# Altium PCB pH-meter.PcbDoc
Units mm, origin at the board's own origin, x right, y up, seen from the top; angles counter-clockwise.
Board outline 55 x 105 mm, 2 copper layers (Top Layer, Bottom Layer); 49 components, 47 nets, 210 pads, 31 vias.
Unrouted connection lines stored in the file: 2.
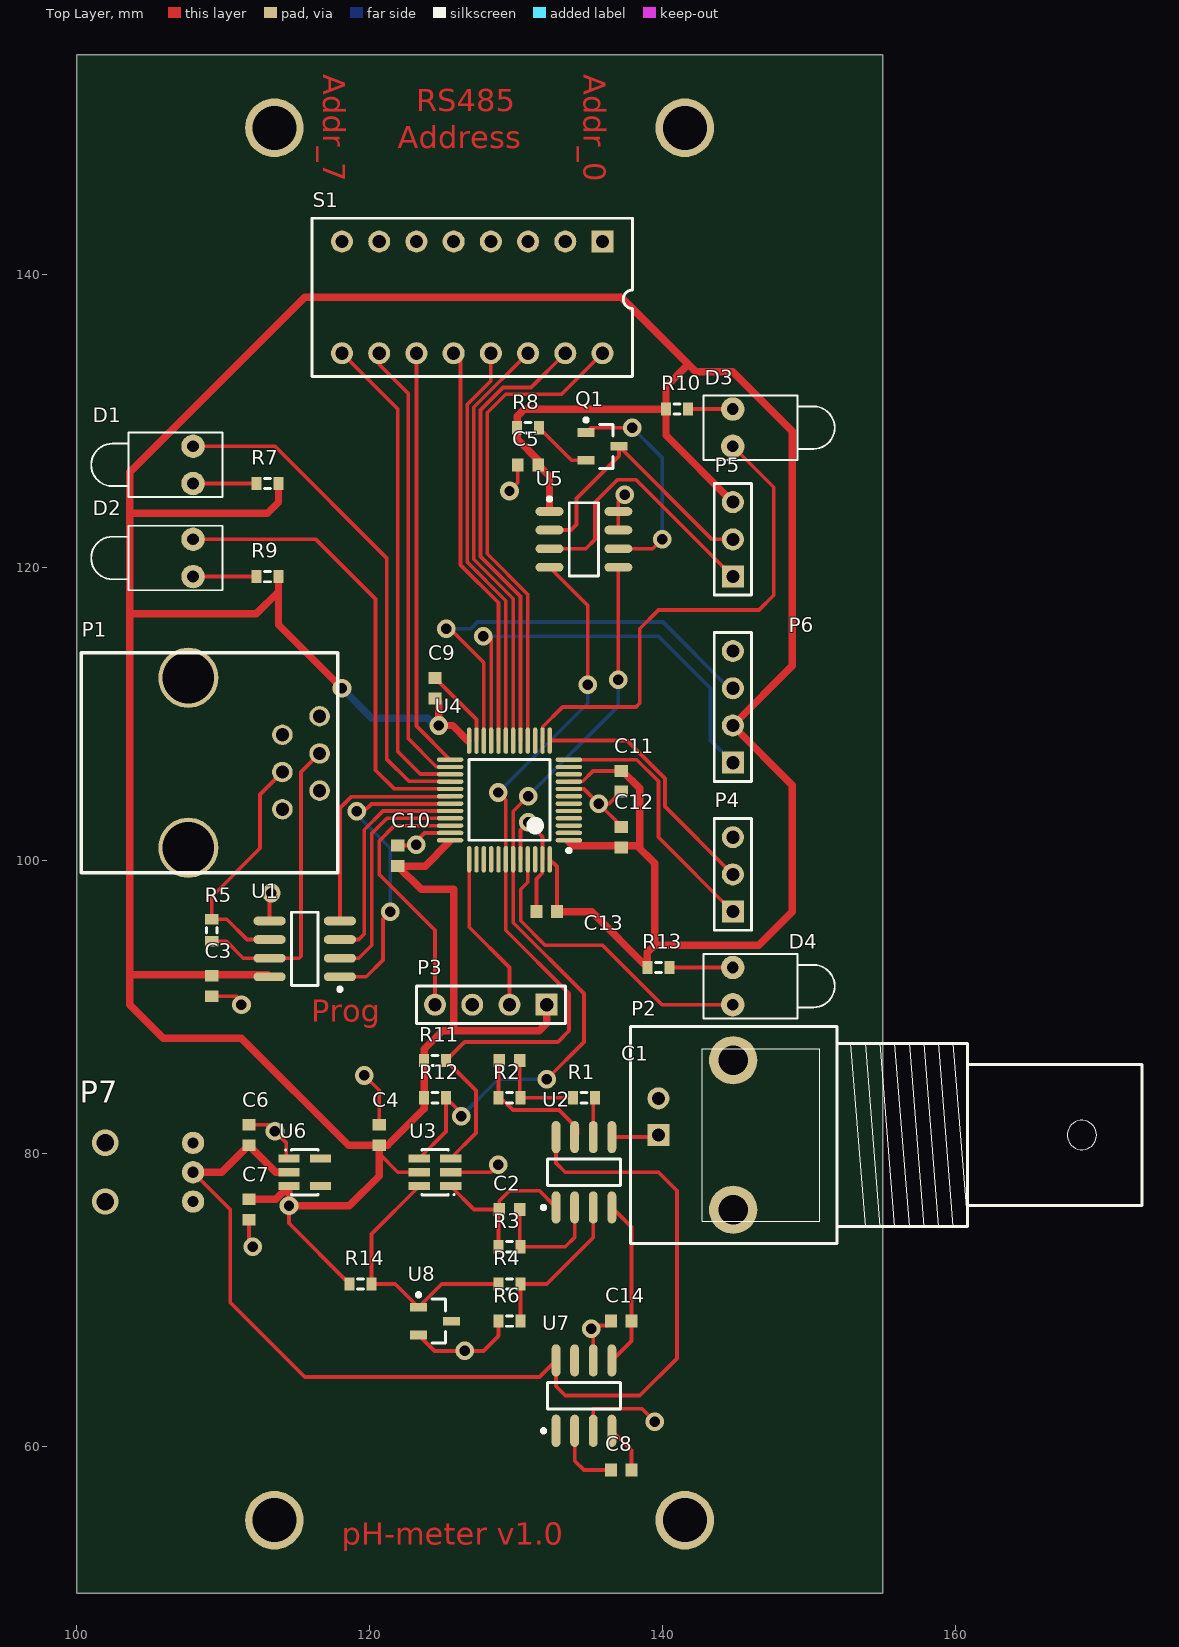
[diagram p0: Top Layer view]
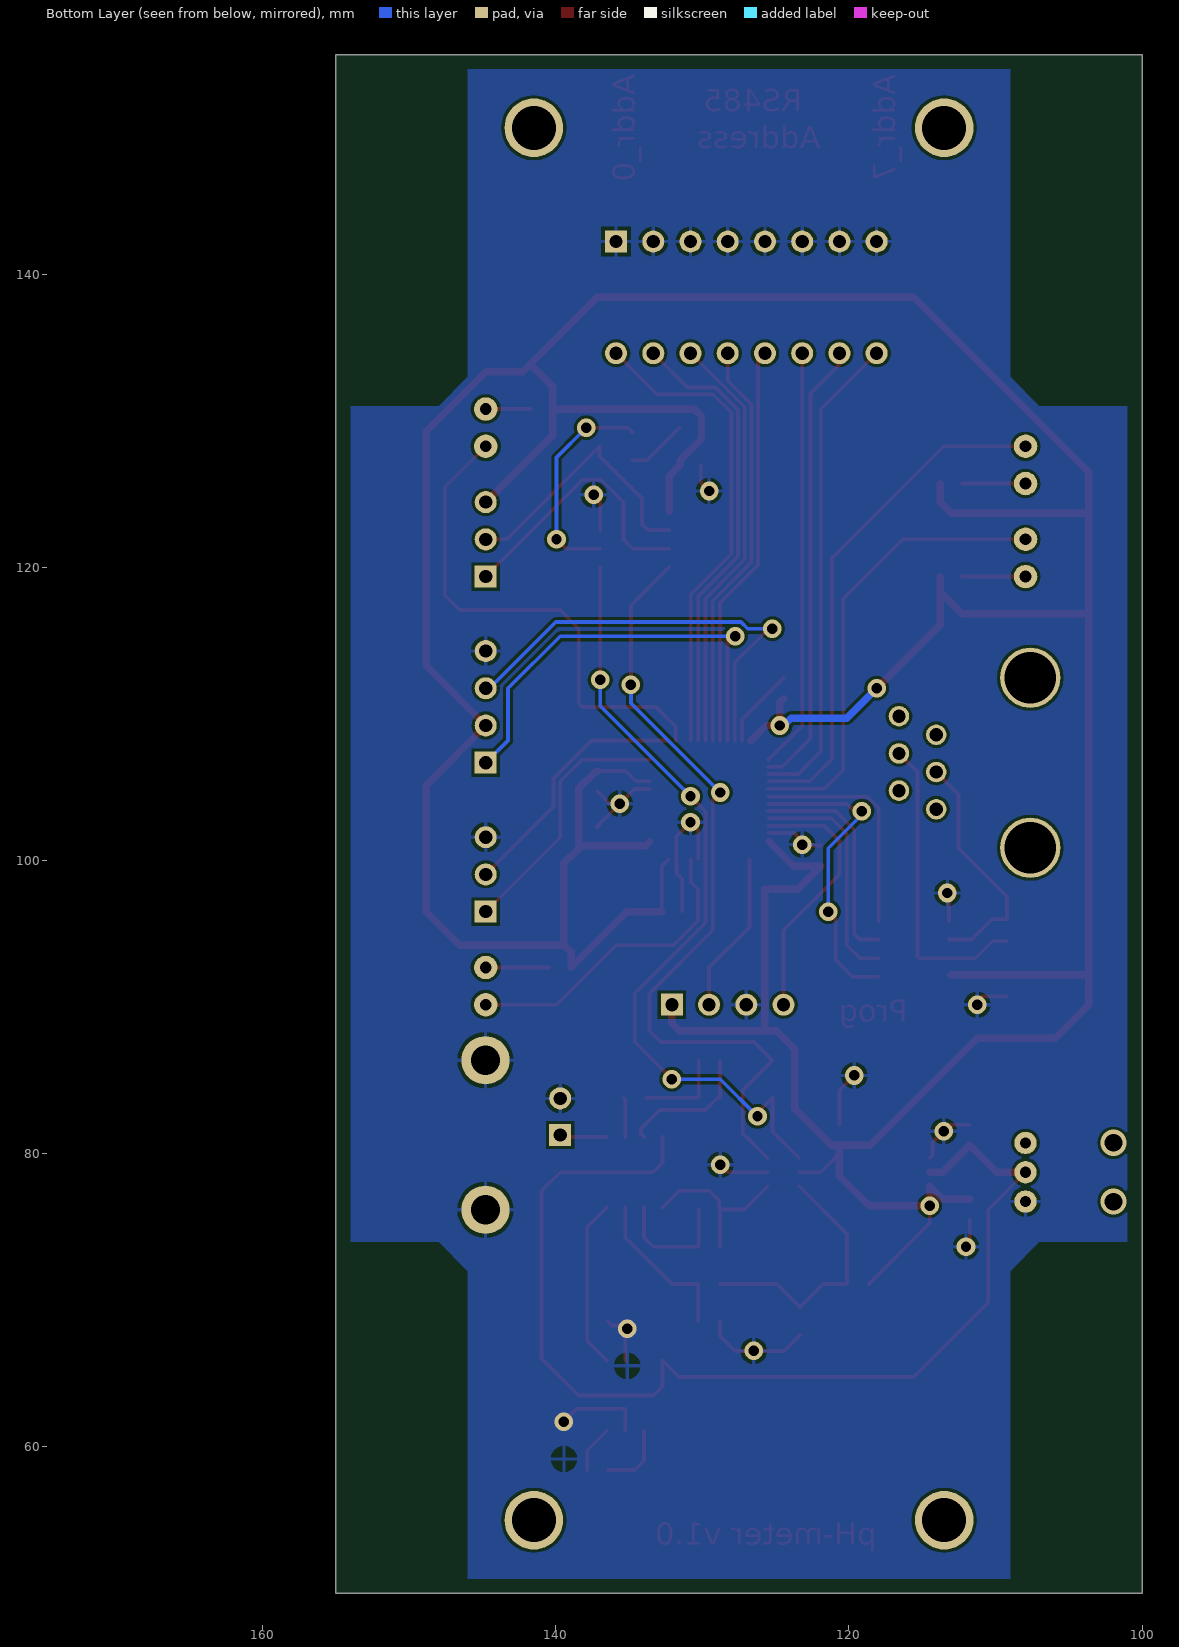
[diagram p1: Bottom Layer view, seen from below]

## Layer stack, top to bottom
Top Layer: signal copper 0.0356
Dielectric: dielectric 0.32, FR-4, Dk 4.8
Bottom Layer: signal copper 0.0356

## Board outline
100,50 100,155 155,155 155,50

## Design rules (kind name [scope] priority, off if disabled: settings)
Clearance [All] p1: gap=0.2
PolygonConnect [All] p1: connectstyle=Relief reliefconductorwidth=0.254 reliefentries=4 polygonreliefangle="90 Angle" airgapwidth=0.254
RoomDefinition pH-meter [InComponentClass('pH-meter')] p1: confinementstyle=ConfineIn formatcopy=TRUE lockcomponents=FALSE outline 100,50 155,50 155,155 100,155
RoutingVias [All] p1: holewidth=0.711 width=1.27 viastyle="Through Hole" minholewidth=0.711 minwidth=1.27 maxholewidth=0.711 maxwidth=1.27
SilkscreenOverComponentPads [All] p1: minsilkscreentomaskgap=0.254
SolderMaskExpansion [All] p1: expansion=0.102
Width [(InNet('+3.3') OR InNet('+5'))] p1: maxlimit=1.016 minlimit=0.254 preferedwidth=0.508
Width Width_1 [All] p2: maxlimit=0.254 minlimit=0.254 preferedwidth=0.254
27 further rules are at their usual default settings.

## Components (designator, comment, footprint, x,y, rotation, side; value= is the part's Value field where it differs from the comment)
C1 "Cap Semi" 1608[0603] 129.54,86.36 r0 top
C2 "Cap Semi" 1608[0603] 129.54,76.2 r0 top
C3 "Cap Semi" 1608[0603] 109.22,91.44 r90 top
C4 "Cap Semi" 1608[0603] 120.65,81.28 r270 top
C5 "Cap Semi" 1608[0603] 130.81,127 r0 top
C6 "Cap Semi" 1608[0603] 111.76,81.28 r270 top
C7 "Cap Semi" 1608[0603] 111.76,76.2 r90 top
C8 "Cap Semi" 1608[0603] 137.16,58.42 r180 top
C9 "0.1uF" 1608[0603] 124.46,111.76 r270 top
C10 "0.1uF" 1608[0603] 121.92,100.33 r270 top
C11 "0.1uF" 1608[0603] 137.16,105.41 r90 top
C12 "0.1uF" 1608[0603] 137.16,101.6 r270 top
C13 "0.1uF" 1608[0603] 132.08,96.52 r0 top
C14 "Cap Semi" 1608[0603] 137.16,68.58 r0 top
D1 "LED1" LED-1 107.95,127 r180 top
D2 "LED1" LED-1 107.95,120.65 r180 top
D3 "LED1" LED-1 144.78,129.54 r0 top
D4 "LED1" LED-1 144.78,91.44 r0 top
P1 "RJ11" RJ11_6 100.33,106.68 r0 top
P2 "BNC" "BNC_RA CON" 139.7,81.28 r180 top
P3 "Programming" HDR1X4 132.08,90.17 r180 top
P4 "USART" HDR1X3 144.78,96.52 r90 top
P5 "Temp" HDR1X3 144.78,119.38 r90 top
P6 "PORT" HDR1X4 144.78,106.68 r90 top
P7 "DJK-07D" DJK-07D 107.95,78.74 r270 top
Q1 "IRLML6302" SOT-23_N 135.89,128.27 r0 top
R1 "Res_SMD" J1-0603 134.62,83.82 r0 top
R2 "Res_SMD" J1-0603 129.54,83.82 r180 top
R3 "Res_SMD" J1-0603 129.54,73.66 r180 top
R4 "Res_SMD" J1-0603 129.54,71.12 r0 top
R5 "Res_SMD" J1-0603 109.22,95.25 r270 top
R6 "Res_SMD" J1-0603 129.54,68.58 r0 top
R7 "470" J1-0603 113.03,125.73 r0 top
R8 "Res_SMD" J1-0603 130.81,129.54 r0 top
R9 "470" J1-0603 113.03,119.38 r0 top
R10 "470" J1-0603 140.97,130.81 r180 top
R11 "Res_SMD" J1-0603 124.46,86.36 r180 top
R12 "Res_SMD" J1-0603 124.46,83.82 r180 top
R13 "470" J1-0603 139.7,92.71 r180 top
R14 "Res_SMD" J1-0603 119.38,71.12 r180 top
S1 "SW-DIP8" DIP-16-KEY 135.89,142.24 r180 top
U1 "MAX1487CSA" NSO8_N 115.57,93.98 r180 top
U2 "TL062AID" SO8_N 134.62,78.74 r90 top
U3 "ADS1110" SOT-23_A 124.46,78.74 r90 top
U4 "STM32F101C8T6" LQFP48_N 129.54,104.14 r180 top
U5 "DS2482-100" NSO8_L 134.62,121.92 r0 top
U6 "MC78LC33NTR" 1212-01 115.57,78.74 r270 top
U7 "ADM660AR" SO-8_N 134.62,63.5 r90 top
U8 "AD1580ART" RT-3_N 124.46,68.58 r0 top

## Footprints (in the part's own frame and the unit in brackets; to place one, negate y for a bottom-side part, rotate by r counter-clockwise, add the part's x,y. Pads: shape width x height; smd on the part's side, far side on the other; paste and mask are expansions set on the pad)
1212-01 [mm] "SOT-23/SC-74A; 5 Leads; Body 3 x 3.1 mm, inc. leads (LxW max)"
  rect 0.55x1.45 smd: 1(-0.95,-1.075) 2(0,-1.075) 3(0.95,-1.075) 4(0.95,1.075) 5(-0.95,1.075)
  silkscreen extent -1.57,-1.35 1.55,0.9
1608[0603] [mm] "Chip Capacitor, Body 1.6x0.8mm, IPC High Density"
  rect 0.8x0.9 smd: 1(-0.7,0) 2(0.7,0)
  body extent -0.87,-0.48 0.87,0.48, height 1.3
"BNC_RA CON" [mm] "Connector; BNC Elbow"
  rect 1.5x1.5 hole 0.9: 1(0,0)
  round 3.3 hole 2: 2(-5.1,5.1) 2(-5.1,-5.1)
  round 1.5 hole 0.9: 2(0,-2.5)
  silkscreen extent -33,-7.4 1.9,7.4
DIP-16-KEY [mm] "DIP; 16 Leads; Row Spacing 7.62 mm; Pitch 2.54 mm"
  rect 1.5x1.5 hole 0.9: 1(0,0)
  round 1.5 hole 0.9: 2(2.54,0) 3(5.08,0) 4(7.62,0) 5(10.16,0) 6(12.7,0) 7(15.24,0) 8(17.78,0) 9(17.78,7.62) 10(15.24,7.62) 11(12.7,7.62) 12(10.16,7.62) 13(7.62,7.62) 14(5.08,7.62) 15(2.54,7.62) 16(0,7.62)
  silkscreen extent -2.05,-1.59 19.83,9.2
DJK-07D [mil] "Разъем питания штырев. 1,3мм (п) на плату"
  round 60 hole 30: 1(0,0) 2(78.74,0) 3(-78.74,0)
  body extent -157,-315 157,39, height 197
HDR1X3 [mm] "Connector; Header; 3 Position"
  rect 1.5x1.5 hole 0.9: 1(0,0)
  round 1.5 hole 0.9: 2(2.54,0) 3(5.08,0)
  silkscreen extent -1.27,-1.27 6.35,1.27
HDR1X4 [mm] "Connector; Header; 4 Position"
  rect 1.5x1.5 hole 0.9: 1(0,0)
  round 1.5 hole 0.9: 2(2.54,0) 3(5.08,0) 4(7.62,0)
  silkscreen extent -1.27,-1.27 8.89,1.27
J1-0603 [mm] "Chip Resistor, Body 1.6x0.8mm, IPC High Density"
  rect 0.7x0.9 smd: 1(-0.75,0) 2(0.75,0)
  silkscreen extent -0.2,-0.35 0.2,0.35, body extent -0.85,-0.48 0.85,0.48, height 0.9
LED-1 [mm] "LED; 2 Leads"
  round 1.6 hole 0.8: 1(0,1.27) 2(0,-1.27)
  silkscreen extent -2,-2.2 6.95,2.2
LQFP48_N [mm] "Thin QFP, 48-Leads, Body 7x7mm, Pitch 0.5mm, IPC Medium Density"
  oval 1.8x0.3 smd: 1(-4.05,2.75) 2(-4.05,2.25) 3(-4.05,1.75) 4(-4.05,1.25) 5(-4.05,0.75) 6(-4.05,0.25) 7(-4.05,-0.25) 8(-4.05,-0.75) 9(-4.05,-1.25) 10(-4.05,-1.75) 11(-4.05,-2.25) 12(-4.05,-2.75) 25(4.05,-2.75) 26(4.05,-2.25) 27(4.05,-1.75) 28(4.05,-1.25) 29(4.05,-0.75) 30(4.05,-0.25) 31(4.05,0.25) 32(4.05,0.75) 33(4.05,1.25) 34(4.05,1.75) 35(4.05,2.25) 36(4.05,2.75)
  oval 0.3x1.8 smd: 13(-2.75,-4.05) 14(-2.25,-4.05) 15(-1.75,-4.05) 16(-1.25,-4.05) 17(-0.75,-4.05) 18(-0.25,-4.05) 19(0.25,-4.05) 20(0.75,-4.05) 21(1.25,-4.05) 22(1.75,-4.05) 23(2.25,-4.05) 24(2.75,-4.05) 37(2.75,4.05) 38(2.25,4.05) 39(1.75,4.05) 40(1.25,4.05) 41(0.75,4.05) 42(0.25,4.05) 43(-0.25,4.05) 44(-0.75,4.05) 45(-1.25,4.05) 46(-1.75,4.05) 47(-2.25,4.05) 48(-2.75,4.05)
  silkscreen extent -4.18,-2.75 2.75,3.57, body extent -3.5,-3.5 3.5,3.5, height 1.6
NSO8_L [mm] "8-Pin Small Outline Integrated Circuit 1.27 mm Pitch, IPC High Density"
  oval 1.9x0.6 smd: 1(-2.35,1.905) 2(-2.35,0.635) 3(-2.35,-0.635) 4(-2.35,-1.905) 5(2.35,-1.905) 6(2.35,-0.635) 7(2.35,0.635) 8(2.35,1.905)
  silkscreen extent -2.47,-2.5 1,2.88, body extent -1.95,-2.45 1.95,2.45, height 1.75
NSO8_N [mm] "SOIC, 8-Leads, Body 4.9x3.9mm, Pitch 1.27mm, IPC Medium Density"
  oval 2.2x0.6 smd: 1(-2.4,1.905) 2(-2.4,0.635) 3(-2.4,-0.635) 4(-2.4,-1.905) 5(2.4,-1.905) 6(2.4,-0.635) 7(2.4,0.635) 8(2.4,1.905)
  silkscreen extent -2.53,-2.5 0.9,2.88, body extent -2,-2.5 2,2.5, height 1.75
RJ11_6 [mm]
  round 1.4 hole 0.9: 1(16.256,3.175) 2(13.716,1.905) 3(16.256,0.635) 4(13.716,-0.635) 5(16.256,-1.905) 6(13.716,-3.175)
  round 4.1 hole 3.5: H(7.3,-5.8) H(7.3,5.8)
  silkscreen extent 0,-7.5 17.5,7.5
RT-3_N [mm] "SOT23, 3-Leads, Body 2.9x1.3mm, Pitch 0.95mm, Lead Span 2.4mm, IPC Medium Density"
  rect 1.15x0.6 smd: 1(-1.125,0.95) 2(-1.125,-0.95) 3(1.125,0)
  silkscreen extent -1.25,-1.5 0.7,1.92, body extent -0.7,-1.5 0.7,1.5, height 1.12
SO8_N [mm] "SOIC, 8-Leads, Body 4.9x3.9mm, Pitch 1.27mm, IPC Medium Density"
  oval 2.2x0.6 smd: 1(-2.4,1.905) 2(-2.4,0.635) 3(-2.4,-0.635) 4(-2.4,-1.905) 5(2.4,-1.905) 6(2.4,-0.635) 7(2.4,0.635) 8(2.4,1.905)
  silkscreen extent -2.52,-2.5 0.9,2.88, body extent -1.95,-2.45 1.95,2.45, height 1.75
SO-8_N [mm] "SOIC, 8-Leads, Body 4.9x3.9mm, Pitch 1.27mm, IPC Medium Density"
  oval 2.2x0.6 smd: 1(-2.4,1.905) 2(-2.4,0.635) 3(-2.4,-0.635) 4(-2.4,-1.905) 5(2.4,-1.905) 6(2.4,-0.635) 7(2.4,0.635) 8(2.4,1.905)
  silkscreen extent -2.52,-2.5 0.9,2.88, body extent -1.95,-2.45 1.95,2.45, height 1.75
SOT-23_A [mm] "SOT-457/SC-74; 6 Leads; Body 3.1 x 3 mm, inc. leads (LxW max)"
  rect 0.55x1.45 smd: 1(-0.95,-1.075) 2(0,-1.075) 3(0.95,-1.075) 4(0.95,1.075) 5(0,1.075) 6(-0.95,1.075)
  silkscreen extent -1.57,-1.35 1.55,0.9
SOT-23_N [mm] "SOT23, 3-Leads, Body 2.9x1.3mm, Pitch 0.95mm, Lead Span 2.3mm, IPC Medium Density"
  rect 1.15x0.6 smd: 1(-1.125,0.95) 2(-1.125,-0.95) 3(1.125,0)
  silkscreen extent -1.25,-1.5 0.7,1.92, body extent -0.7,-1.5 0.7,1.5, height 1.11

## Part data
C1 C2 C3 C4 C5 C6 C7 C8 C14: "Capacitor (Semiconductor SIM Model)"
C9 C10 C11 C12 C13: library part "Cap Semi", "Capacitor (Semiconductor SIM Model)"
D1 D2 D3 D4: "Typical RED GaAs LED"
P1: library part RJ11_6C, "RJ11 6pin connector"
P2: "BNC Elbow Connector"
P3 P6: library part "Header 4", "Header, 4-Pin"
P4 P5: library part "Header 3", "Header, 3-Pin"
P7: "DJK-07D Разъем питания штырев. 1,3мм (п) на плату"
Q1: "HEXFET Power MOSFET"
R1 R2 R3 R4 R5 R6 R8 R11 R12 R14: "Resistor"
R7 R9 R10 R13: library part Res_SMD, "Resistor"
S1: "4009 Series DIP Switch, Raised actuator"
U1: "Low-Power, Slew-Rate-Limited RS-485/RS-422 Transceiver"
U2: "Low-Power J-FET Dual Bipolar Operational Amplifier"
U3: "16-Bit ANALOG-TO-DIGITAL CONVERTER"
U4: "STM32 ARM-based 32-bit MCU with 64 Kbytes Flash, 48-pin LQFP, Industrial Temperature"
U5: "Single-Channel 1-Wire Master"
U6: "Micropower Voltage Regulator"
U7: "CMOS Switched-Capacitor Voltage Converter"
U8: "1.2V Micropower, Precision Shunt Voltage Reference"

## Free pads (board coordinates)
  round 4 hole 3: 0(113.5,55) 0(113.5,150) 0(141.5,55) 0(141.5,150)

## Via types
v1: diameter 1.27, hole 0.711, Top Layer to Bottom Layer, 29 vias
v2: diameter 1.8, hole 1.2, Top Layer to Bottom Layer, 2 vias

## Nets (pads, with @x,y where several pads share a name; then routed paths per layer and width w, separated by ;. In a path a pad name is that pad's centre, name@x,y a point inside that pad or via, vN(x,y) a via of type N, cw(c..) or ccw(c..) an arc to the next point about the centre after c; other vN are vias at no path point)
485_ADR0: S1.16 U4.16 | length 33.1
  Top Layer w0.254: U4.16 130.79,118.158 128.016,120.932 128.016,130.556 129.286,131.826 133.096,131.826 S1.16
485_ADR1: S1.15 U4.17 | length 31.1
  Top Layer w0.254: U4.17 130.29,118.016 127.562,120.744 127.562,130.744 129.098,132.28 131.01,132.28 S1.15
485_ADR2: S1.14 U4.18 | length 29.1
  Top Layer w0.254: U4.18 129.79,117.874 127.108,120.556 127.108,130.932 130.796,134.62 S1.14
485_ADR3: S1.13 U4.19 | length 28.2
  Top Layer w0.254: S1.13 128.27,132.736 126.654,131.12 126.654,120.368 129.29,117.732 U4.19
485_ADR4: S1.12 U4.20 | length 27.7
  Top Layer w0.254: S1.12 126.2,134.15 126.2,120.18 128.79,117.59 U4.20
485_ADR5: S1.11 U4.25 | length 28.7
  Top Layer w0.254: S1.11 123.19,109.19 U4.25
485_ADR6: S1.10 U4.26 | length 30.8
  Top Layer w0.254: S1.10 120.65,133.858 122.628,131.88 122.628,108.327 124.542,106.413 125.467,106.413 U4.26
485_ADR7: S1.9 U4.27 | length 33
  Top Layer w0.254: S1.9 121.92,130.81 121.92,107.442 123.449,105.913 125.467,105.913 U4.27
+3.3: C3.2 C4.2 C5.2 C7.2 C9.2 C10.2 C11.2 C12.2 C13.2 P3.1 P5.3 P6.2 R7.2 R8.1 R9.2 R10.2 R11.2 R12.2 R13.2 R14.2 U1.8 U3.5 U4.1 U4.9 U4.24 U4.36 U4.48 U5.1 U6.3 | length 337
  Top Layer w0.254: U1.8@113.043,92.14 U1.8@113.105,92.14 ; v1(114.495,76.454) 114.495,75.255 R14.2 ; 120.65,80.01 121.92,78.74 U3.5 ; U4.36@125.438,101.338 U4.36 ; U4.48 132.78,99.6 C13.2 ; U4.9 133.613,105.413 134.538,105.413 135.235,106.11 C11.2
  Top Layer w0.508: C7.2 113.605,76.9 U6.3 v1(114.495,76.454) 118.618,76.454 120.65,78.486 120.65,80.01 C4.2 ; U1.8@113.043,92.202 103.632,92.202 ; R9.2 113.78,118.352 ; R7.2 113.78,124.448 113.03,123.698 103.632,123.698 ; v1(118.11,111.76) 113.78,116.09 113.78,118.352 ; C9.2 124.714,110.806 v1(124.714,109.22) 125.656,109.22 U4.24@126.686,108.19 ; U4.36@125.438,101.286 123.782,99.63 C10.2 123.506,98.044 125.73,98.044 125.73,88.392 ; P3.1 132.08,88.9 131.572,88.392 125.73,88.392 ; U5.1 132.27,126.24 C5.2 131.51,127.316 130.06,128.766 R8.1 130.06,130.314 130.556,130.81 R10.2 ; C13.2 135.14,96.52 R13.2 138.95,93.738 139.446,94.234 ; U4.1@133.59,101.286 133.846,101.03 138.43,101.03 138.43,104.932 137.252,106.11 C11.2 ; 138.238,101.03 139.446,99.822 139.446,94.234 ; 141.732,133.858 140.22,132.346 R10.2 ; P5.3 140.22,129.02 R10.2 ; 103.632,92.202 103.632,90.17 105.918,87.884 111.252,87.884 118.556,80.58 C4.2 ; 103.632,92.202 103.632,116.84 ; 103.632,116.84 112.268,116.84 113.78,118.352 ; 103.632,116.84 103.632,123.698 ; 103.632,123.698 103.632,126.492 115.57,138.43 137.16,138.43 142.24,133.35 144.78,133.35 148.844,129.286 148.844,113.284 P6.2 148.844,105.156 148.844,96.52 146.558,94.234 139.446,94.234 ; C4.2 121.22,80.58 123.71,83.07 R12.2 R11.2 123.71,87.134 124.968,88.392 125.73,88.392
  Bottom Layer w0.508: v1(118.11,111.76) 120.142,109.728 123.952,109.728 124.714,108.966 v1(124.714,109.22)
+5: C6.2 P7.1 U2.8 U6.2 U7.8 | length 76.4
  Top Layer w0.254: P7.1 110.49,76.2 110.49,69.85 115.57,64.77 131.585,64.77 U7.8 132.715,64.135 133.35,63.5 138.43,63.5 140.97,66.04 140.97,77.47 139.7,78.74 133.35,78.74 132.715,79.375 U2.8
  Top Layer w0.508: P7.1 109.92,78.74 C6.2 113.6,78.74 U6.2
-5: C14.2 U2.4 U7.5 | length 12.9
  Top Layer w0.254: U7.5 137.86,67.235 ; U2.4 137.86,75.005 137.86,67.235 ; C14.2 137.86,67.235
A_OUT: P1.4 R5.1 U1.6 | length 16.6
  Top Layer w0.254: U1.6 111.633,94.615 110.248,96 R5.1 109.22,97.536 112.522,100.838 112.522,104.521 P1.4
AMPOUT: C2.1 R3.2 U2.1 U3.1 | length 11.7
  Top Layer w0.254: U3.1 127.125,76.2 C2.1 ; R3.2 128.79,76.15 C2.1 ; U2.1 131.585,77.47 129.54,77.47 128.84,76.77 C2.1
B_OUT: P1.3 R5.2 U1.7 | length 21
  Top Layer w0.254: R5.2 110.224,94.5 111.379,93.345 U1.7 115.189,93.345 115.316,93.472 115.316,106.045 P1.3
DE: U1.3 U4.32 | length 15.3
  Top Layer w0.254: U1.3 119.253,94.615 119.634,94.996 119.634,102.108 120.916,103.39 U4.32
GND: C3.1 C4.1 C5.1 C6.1 C7.1 C9.1 C10.1 C11.1 C12.1 C13.1 C14.1 P2.2 P3.3 P4.3 P6.4 P7.2 R6.1 S1.1 S1.2 S1.3 S1.4 S1.5 S1.6 S1.7 S1.8 U1.5 U3.2 U4.8 U4.23 U4.35 U4.44 U4.47 U5.7 U5.8 U6.1 U7.3 U7.6 U8.2 | length 65
  Top Layer w0.254: C3.1 110.936,90.74 v1@111.506,90.17 ; C7.1 111.76,73.914 v1(112.014,73.66) ; C6.1 113.092,81.98 114.3,80.772 114.3,79.885 U6.1 ; U1.5 113.17,97.676 v1(113.284,97.79) ; v1(119.634,85.344) 120.65,84.328 C4.1 ; C10.1 122.874,101.03 123.734,101.89 U4.35 ; U8.2 124.417,66.548 127.762,66.548 128.79,67.576 R6.1 ; C9.1 127.29,109.63 U4.23 ; U3.2 128.27,78.74 v1(128.778,79.248) ; v1(129.54,125.222) 130.11,125.792 C5.1 ; U4.44 130.29,102.096 v1(130.81,102.616) 131.79,101.636 U4.47 131.767,100.067 131.767,99.142 131.38,98.755 C13.1 ; U4.8 134.632,104.89 v1(135.636,103.886) ; U7.3 135.255,62.611 138.557,62.611 v1(139.446,61.722) v1@139.446,61.468 ; U7.6 135.255,67.945 135.589,68.279 136.159,68.279 C14.1 ; U5.7 U5.8 136.97,124.524 v1(137.414,124.968) ; C12.1 137.16,102.362 v1(135.636,103.886) ; C11.1 136.336,103.886 v1(135.636,103.886)
  other v1: 126.492,66.548 135.128,68.072 113.538,81.534 111.252,90.17 123.19,101.092
LED1: D1.2 U4.28 | length 35.1
  Top Layer w0.254: D1.2 113.538,128.27 121.158,120.65 121.158,106.934 122.679,105.413 125.467,105.413 U4.28
LED2: D2.2 U4.29 | length 31.4
  Top Layer w0.254: D2.2 116.332,121.92 120.396,117.856 120.396,106.172 121.655,104.913 125.467,104.913 U4.29
LED3: D3.2 U4.14 | length 34.7
  Top Layer w0.254: U4.14 131.813,108.213 131.813,109.138 133.165,110.49 138.176,110.49 138.43,110.744 138.43,115.824 139.7,117.094 146.558,117.094 147.574,118.11 147.574,125.476 D3.2
LED4: D4.2 U4.45 | length 21.2
  Top Layer w0.254: U4.45 130.79,98.532 130.302,98.044 130.302,95.892 131.96,94.234 135.89,94.234 139.954,90.17 D4.2
NetC1_1: C1.1 C2.2 R2.2 R3.1 U2.2 U2.7 | length 18
  Top Layer w0.254: C1.1@128.79,86.31 R2.2 128.951,83.82 129.782,82.989 132.911,82.989 134.181,81.719 134.181,81.336 U2.7 ; C2.2 130.24,73.71 R3.1 133.35,73.66 133.985,74.295 U2.2
NetC1_2: C1.2 R1.1 R2.1 | length 6.1
  Top Layer w0.254: R2.1@130.24,83.87 C1.2 ; R2.1 R1.1
NetC8_1: C8.1 U7.4 | length 3.2
  Top Layer w0.254: U7.4 137.86,59.765 C8.1
NetC8_2: C8.2 U7.2 | length 4.8
  Top Layer w0.254: U7.2 133.985,59.055 134.62,58.42 C8.2
NetD1_1: D1.1 R7.1 | length 4.3
  Top Layer w0.254: D1.1 R7.1
NetD2_1: D2.1 R9.1 | length 4.3
  Top Layer w0.254: D2.1 R9.1
NetD3_1: D3.1 R10.1 | length 3.1
  Top Layer w0.254: R10.1 D3.1
NetD4_1: D4.1 R13.1 | length 4.3
  Top Layer w0.254: R13.1 D4.1
NetP2_1: P2.1 U2.5 | length 3.2
  Top Layer w0.254: U2.5 139.56,81.14 P2.1
NetP5_1: P5.1 U5.3 | length 18.7
  Top Layer w0.254: U5.3 134.747,121.285 135.382,121.92 135.382,124.46 136.906,125.984 138.176,125.984 P5.1
NetP5_2: P5.2 Q1.3 U5.2 | length 18.9
  Top Layer w0.254: U5.2 133.731,122.555 134.112,122.936 134.112,124.714 137.015,127.617 Q1.3 143.365,121.92 P5.2
NetQ1_1: Q1.1 U5.6 | length 15
  Top Layer w0.254: Q1.1 135.085,129.54 v1(137.922,129.54) ; U5.6 139.319,121.285 v1(139.954,121.92)
  Bottom Layer w0.254: v1(137.922,129.54) 139.954,127.508 v1(139.954,121.92)
NetQ1_2: Q1.2 R8.2 | length 4.1
  Top Layer w0.254: R8.2 133.78,127.32 Q1.2
NetR1_2: R1.2 U2.6 | length 2.7
  Top Layer w0.254: U2.6 135.255,83.705 R1.2
NetR4_2: R4.2 R6.2 U2.3 | length 10.9
  Top Layer w0.254: R6.2 R4.2 132.08,71.12 135.255,74.295 U2.3
PORT1: P6.1 U4.21 | length 31
  Top Layer w0.254: v1(127.762,115.316) 127.762,115.824 128.29,115.296 U4.21
  Bottom Layer w0.254: v1(127.762,115.316) 139.7,115.316 143.256,111.76 143.256,108.204 P6.1
PORT2: P6.3 U4.22 | length 30.5
  Top Layer w0.254: v1(125.222,115.824) 125.476,115.824 127.79,113.51 U4.22
  Bottom Layer w0.254: v1(125.222,115.824) 126.91,115.824 127.364,116.278 140.008,116.278 144.526,111.76 P6.3
RE: U1.2 U4.33 | length 15.9
  Top Layer w0.254: U1.2 119.253,93.345 120.142,94.234 120.142,101.854 121.178,102.89 U4.33
SCL: R11.1 U3.3 U4.42 U5.4 | length 54.7
  Top Layer w0.254: U3.3 127.254,81.409 127.254,84.316 R11.1 126.48,87.63 132.842,87.63 133.604,88.392 133.604,90.932 129.29,95.246 U4.42 129.29,104.136 v1(128.778,104.648) ; U5.4 134.874,117.411 v1(134.874,112.014)
  Bottom Layer w0.254: v1(128.778,104.648) 134.874,110.744 v1(134.874,112.014)
SDA: R12.1 U3.4 U4.43 U5.5 | length 54.4
  Top Layer w0.254: U3.4 125.21,81.515 R12.1 126.238,82.792 v1(126.238,82.55) ; v1(130.81,104.394) 129.79,103.374 U4.43 129.79,95.762 134.62,90.932 134.62,87.63 v1(132.08,85.09) ; v1(136.97,112.332) U5.5
  Bottom Layer w0.254: v1(126.238,82.55) 128.778,85.09 v1(132.08,85.09) ; v1(130.81,104.394) 136.97,110.554 v1(136.97,112.332)
SWCLK: P3.2 U4.37 | length 11.1
  Top Layer w0.254: U4.37 126.79,95.46 129.54,92.71 P3.2
SWDO: P3.4 U4.34 | length 18
  Top Layer w0.254: P3.4 124.46,95.25 120.65,99.06 120.65,101.346 121.694,102.39 U4.34
UART1_RX: U1.1 U4.31 | length 21.3
  Top Layer w0.254: U1.1 119.761,92.075 120.904,93.218 120.904,96.012 v1(121.412,96.52) ; v1(119.126,103.378) 119.634,103.378 120.123,103.867 125.467,103.867 U4.31
  Bottom Layer w0.254: v1(119.126,103.378) 119.126,103.124 121.412,100.838 v1(121.412,96.52)
UART1_TX: U1.4 U4.30 | length 15.6
  Top Layer w0.254: U1.4 117.97,103.582 118.755,104.367 125.467,104.367 U4.30
UART2_RX: P4.2 U4.13 | length 17.4
  Top Layer w0.254: U4.13 137.562,108.19 140.154,105.598 140.154,103.686 P4.2
UART2_TX: P4.1 U4.12 | length 17.7
  Top Layer w0.254: U4.12 138.22,106.89 139.7,105.41 139.7,101.6 P4.1
V_ETALON: R4.1 R14.1 U3.6 U8.1 | length 18
  Top Layer w0.254: U3.6 120.13,74.535 R14.1 121.745,71.12 U8.1 124.925,71.12 R4.1
pads on no net: P1.1 P1.2 P1.5 P1.6 P1.H P7.3 U4.2 U4.3 U4.4 U4.5 U4.6 U4.7 U4.10 U4.11 U4.15 U4.38 U4.39 U4.40 U4.41 U4.46 U6.4 U6.5 U7.1 U7.7 U8.3
copper on no net:
  other v2: 101.95,76.74 101.95,80.74

## Polygon pours and split planes (outlines as drawn)
GND on Bottom Layer "g" (solid, pour order 3): 109,154 146,154 146,133 148,131 154,131 154,74 149,74 148,74 146,72 146,51 109,51 109,72 107,74 101,74 101,131 107,131 109,133

## Other copper
Top Layer:
  text "Addr_7" at 116.84,153.67 h1.52 r270
  text "Addr_0" at 134.62,153.67 h1.52 r270
  text "RS485" at 123.19,151.13 h1.52
  text "Address" at 121.92,148.59 h1.52
  text "Prog" at 116,89 h1.52
  text "pH-meter v1.0" at 118.11,53.34 h1.52

## Silkscreen, mask and mechanical layers (free items; w line width, h text height)
Mechanical 11:
  lines w0.254: 100,102.5 155,102.5 ; 103,73 cw(c103,68) 108,68 ; 103,132 ccw(c103,137) 108,137 ; 127.5,50 127.5,155 ; 147,68 cw(c152,68) 152,73 ; 147,137 ccw(c152,137) 152,132 ; 100,73 155,73 155,132 100,132 100,73 ; 108,50 108,155 147,155 147,50 108,50

## Dimensions
113.5,150 to 141.5,150 on Mechanical 12
113.5,150 to 127.5,155 on Mechanical 12
141.5,150 to 127.5,155 on Mechanical 12
141.5,150 to 113.5,150 on Mechanical 12
113.5,150 to 100,102.5 on Mechanical 12
113.5,55 to 141.5,55 on Mechanical 12
113.5,55 to 127.5,50 on Mechanical 12
141.5,55 to 127.5,50 on Mechanical 12
113.5,55 to 100,102.5 on Mechanical 12
100,50 to 100,155 on Mechanical 12
152.5,137.5 to 152.249,137.249 on Mechanical 12
100,155 to 155,155 on Mechanical 12